# Altium PCB Slave_1 - Copy.PcbDoc
Units mm, origin at the board's own origin, x right, y up, seen from the top; angles counter-clockwise.
Board outline 304.4 x 63 mm, 2 copper layers (Top Layer, Bottom Layer); 90 components, 81 nets, 286 pads, 95 vias.
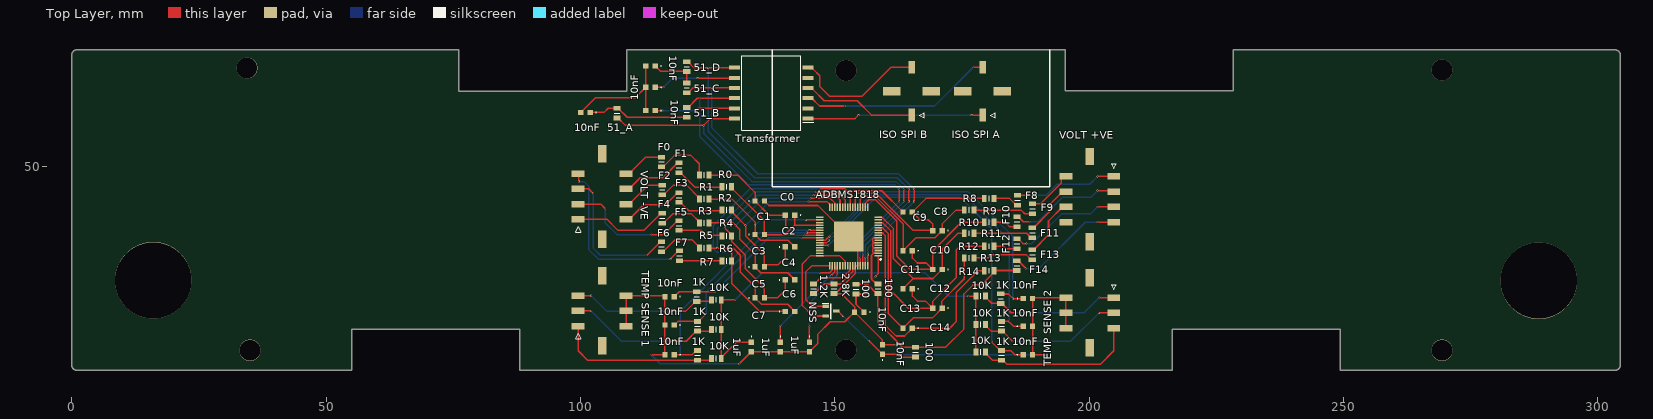
[diagram p0: Top Layer view]
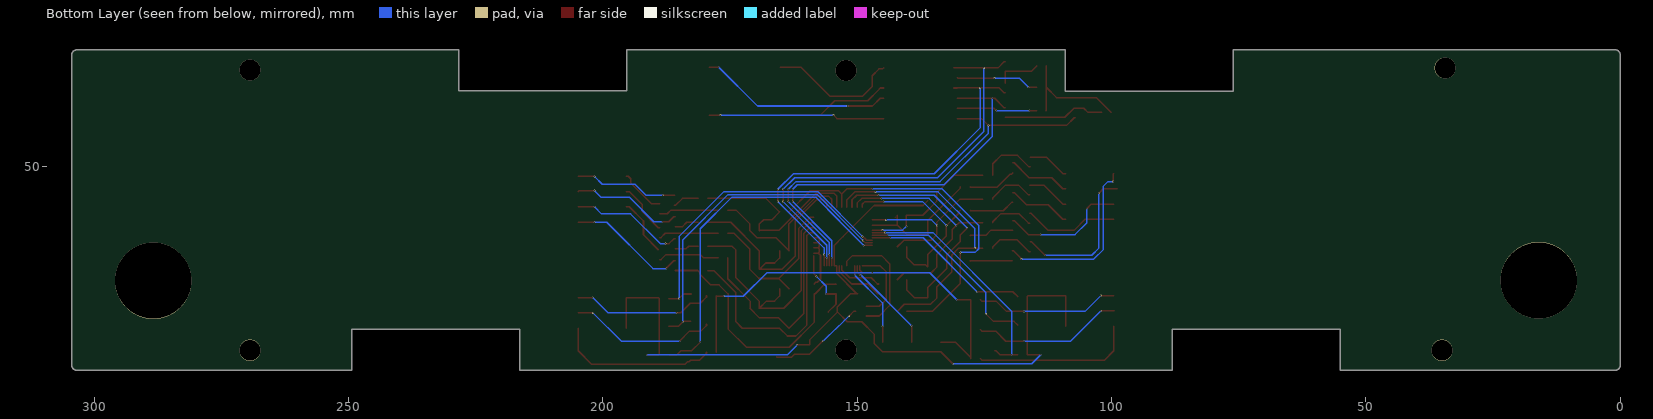
[diagram p1: Bottom Layer view, seen from below]
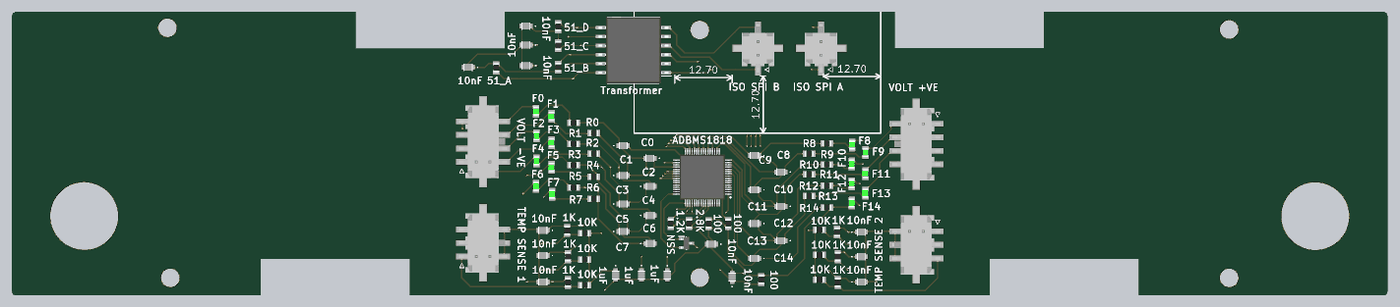
[diagram p2: 3D render of the assembled board from above, using the file's embedded part models]

## Layer stack, top to bottom
Top Solder: solder mask 0.0102, Solder Resist, Dk 3.5
Top Layer: signal copper 0.0356
Dielectric 1: dielectric 0.32, FR-4, Dk 4.8
Bottom Layer: signal copper 0.0356
Bottom Solder: solder mask 0.0102, Solder Resist, Dk 3.5

## Board outline
1.013,9.893 55.083,9.893 55.083,17.993 88.083,17.993 88.083,9.893 216.343,9.893 216.343,17.993 249.343,17.993 249.343,9.893 303.413,9.893 ccw(c303.413,10.893) 304.413,10.893 304.413,71.893 ccw(c303.413,71.893) 303.413,72.893 228.343,72.893 228.343,64.893 195.343,64.893 195.343,72.893 109.083,72.893 109.083,64.793 76.083,64.793 76.083,72.893 1.013,72.893 ccw(c1.013,71.893) 0.013,71.893 0.013,10.893 ccw(c1.013,10.893)

## Design rules (kind name [scope] priority, off if disabled: settings)
Clearance [All] p1: gap=0.17 ignorepadtopadclearanceinfootprint=FALSE
PolygonConnect [All] p1: connectstyle=Relief reliefconductorwidth=0.254 reliefentries=4 polygonreliefangle="90 Angle" airgapwidth=0.254
RoutingVias [All] p1: holewidth=0.3 width=0.35 viastyle="Through Hole" minholewidth=0.3 minwidth=0.35 maxholewidth=0.3 maxwidth=0.35
SolderMaskExpansion [All] p1: expansion=0.102 istentingtop=FALSE
Width [All] p1: maxlimit=0.6 minlimit=0.3 preferedwidth=0.3 minimp=50.000000 maximp=50.000000 favimp=50.000000
30 further rules are at their usual default settings.

## Classes and differential pairs
component class Slave_1: 1.2K 1K 1uF 2.8K 10K 10nF 51_A 51_B 51_C 51_D 100 ADBMS1818 C0 C1 C2 C3 C4 C5 C6 C7 C8 C9 C10 C11 C12 C13 C14 F0 F1 F2 F3 F4 F5 F6 F7 F8 F9 F10 F11 F12 F13 F14 "ISO SPI A" "ISO SPI B" NSS R0 R1 R2 R3 R4 R5 R6 R7 R8 R9 R10 R11 R12 R13 R14 "TEMP SENSE 1" "TEMP SENSE 2" Transformer "VOLT +VE" "VOLT -VE" "VOLTAGE SENSE 1"

## Components (designator, comment, footprint, x,y, rotation, side; value= is the part's Value field where it differs from the comment)
1.2K "RC0805JR-0710KL" RESC2012X60N 145.796,25.908 r90 top
1K "RC0805JR-0710KL" RESC2012X60N 182.626,24.003 r90 top
1K "RC0805JR-0710KL" RESC2012X60N 123.002,12.827 r90 top
1K "RC0805JR-0710KL" RESC2012X60N 122.875,24.384 r90 top
1K "RC0805JR-0710KL" RESC2012X60N 123.002,18.542 r90 top
1K "RC0805JR-0710KL" RESC2012X60N 182.753,18.542 r90 top
1K "RC0805JR-0710KL" RESC2012X60N 182.753,12.827 r90 top
1uF "C2012C0G1E333J125AA" C2012_Commercial 139.319,14.478 r270 top
1uF "C2012C0G1E333J125AA" C2012_Commercial 145.034,14.478 r270 top
1uF "C2012C0G1E333J125AA" C2012_Commercial 133.604,14.478 r270 top
2.8K "RC0805JR-0710KL" RESC2012X60N 149.86,25.908 r90 top
10K "RC0805JR-0710KL" RESC2012X60N 178.689,24.511 r180 top
10K "RC0805JR-0710KL" RESC2012X60N 126.746,12.192 r0 top
10K "RC0805JR-0710KL" RESC2012X60N 178.689,18.923 r180 top
10K "RC0805JR-0710KL" RESC2012X60N 126.746,23.749 r0 top
10K "RC0805JR-0710KL" RESC2012X60N 178.689,13.462 r180 top
10K "RC0805JR-0710KL" RESC2012X60N 126.746,17.907 r0 top
10nF "C2012C0G1E333J125AA" C2012_Commercial 159.385,13.97 r90 top
10nF "C2012C0G1E333J125AA" C2012_Commercial 154.813,21.336 r180 top
10nF "C2012C0G1E333J125AA" C2012_Commercial 187.96,18.542 r0 top
10nF "C2012C0G1E333J125AA" C2012_Commercial 113.792,69.723 r180 top
10nF "C2012C0G1E333J125AA" C2012_Commercial 187.96,12.954 r0 top
10nF "C2012C0G1E333J125AA" C2012_Commercial 117.541,18.796 r180 top
10nF "C2012C0G1E333J125AA" C2012_Commercial 117.541,12.954 r180 top
10nF "C2012C0G1E333J125AA" C2012_Commercial 113.792,60.96 r180 top
10nF "C2012C0G1E333J125AA" C2012_Commercial 117.541,24.384 r180 top
10nF "C2012C0G1E333J125AA" C2012_Commercial 101.001,60.579 r180 top
10nF "C2012C0G1E333J125AA" C2012_Commercial 113.792,65.532 r180 top
10nF "C2012C0G1E333J125AA" C2012_Commercial 187.96,24.003 r0 top
51_A "RC0805JR-0710KL" RESC2012X60N 107.188,60.452 r90 top
51_B "RC0805JR-0710KL" RESC2012X60N 120.904,60.579 r90 top
51_C "RC0805JR-0710KL" RESC2012X60N 120.904,65.405 r90 top
51_D "RC0805JR-0710KL" RESC2012X60N 120.904,69.596 r90 top
100 "RC0805JR-0710KL" RESC2012X60N 165.862,13.462 r270 top
100 "RC0805JR-0710KL" RESC2012X60N 154.178,25.847 r270 top
100 "RC0805JR-0710KL" RESC2012X60N 158.496,25.908 r90 top
ADBMS1818 "ADBMS1818ASWZ" QFP50P1200X1200X160-65N 152.781,36.195 r180 top
C0 "C2012C0G1E333J125AA" C2012_Commercial 135.255,43.18 r0 top
C1 "C2012C0G1E333J125AA" C2012_Commercial 141.224,40.386 r180 top
C2 "C2012C0G1E333J125AA" C2012_Commercial 135.255,36.576 r0 top
C3 "C2012C0G1E333J125AA" C2012_Commercial 141.224,34.163 r0 top
C4 "C2012C0G1E333J125AA" C2012_Commercial 135.255,30.226 r0 top
C5 "C2012C0G1E333J125AA" C2012_Commercial 141.224,27.686 r0 top
C6 "C2012C0G1E333J125AA" C2012_Commercial 135.255,24.13 r0 top
C7 "C2012C0G1E333J125AA" C2012_Commercial 141.224,21.463 r0 top
C8 "C2012C0G1E333J125AA" C2012_Commercial 164.338,41.021 r180 top
C9 "C2012C0G1E333J125AA" C2012_Commercial 170.18,37.338 r180 top
C10 "C2012C0G1E333J125AA" C2012_Commercial 164.338,33.401 r180 top
C11 "C2012C0G1E333J125AA" C2012_Commercial 170.18,29.718 r180 top
C12 "C2012C0G1E333J125AA" C2012_Commercial 164.338,25.908 r180 top
C13 "C2012C0G1E333J125AA" C2012_Commercial 170.18,22.098 r180 top
C14 "C2012C0G1E333J125AA" C2012_Commercial 164.338,18.161 r180 top
F0 "MFU0805FF01000P100" FUSC2012X55N 115.968,50.846 r270 top
F1 "MFU0805FF01000P100" FUSC2012X55N 119.397,49.703 r270 top
F2 "MFU0805FF01000P100" FUSC2012X55N 116.095,45.339 r270 top
F3 "MFU0805FF01000P100" FUSC2012X55N 119.397,43.861 r270 top
F4 "MFU0805FF01000P100" FUSC2012X55N 116.095,39.797 r270 top
F5 "MFU0805FF01000P100" FUSC2012X55N 119.397,38.354 r270 top
F6 "MFU0805FF01000P100" FUSC2012X55N 115.968,34.163 r270 top
F7 "MFU0805FF01000P100" FUSC2012X55N 119.507,32.385 r270 top
F8 "MFU0805FF01000P100" FUSC2012X55N 185.928,43.353 r270 top
F9 "MFU0805FF01000P100" FUSC2012X55N 188.866,41.656 r270 top
F10 "MFU0805FF01000P100" FUSC2012X55N 185.818,39.116 r270 top
F11 "MFU0805FF01000P100" FUSC2012X55N 188.849,36.957 r270 top
F12 "MFU0805FF01000P100" FUSC2012X55N 185.818,34.752 r270 top
F13 "MFU0805FF01000P100" FUSC2012X55N 188.849,32.639 r270 top
F14 "MFU0805FF01000P100" FUSC2012X55N 185.801,30.48 r270 top
"ISO SPI A" "43045-0218" 43045-02YY_181920 179.07,64.77 r0 top
"ISO SPI B" "43045-0218" 43045-02YY_181920 165.1,64.77 r0 top
NSS "NSS1C201LT1G" SOT96P237X111-3N 149.259,21.524 r0 top
R0 "RC0805JR-0710KL" RESC2012X60N 124.333,48.26 r0 top
R1 "RC0805JR-0710KL" RESC2012X60N 128.778,45.974 r0 top
R2 "RC0805JR-0710KL" RESC2012X60N 124.333,43.561 r0 top
R3 "RC0805JR-0710KL" RESC2012X60N 128.778,41.402 r0 top
R4 "RC0805JR-0710KL" RESC2012X60N 124.333,38.862 r0 top
R5 "RC0805JR-0710KL" RESC2012X60N 128.778,36.322 r0 top
R6 "RC0805JR-0710KL" RESC2012X60N 124.333,33.909 r0 top
R7 "RC0805JR-0710KL" RESC2012X60N 128.778,31.369 r0 top
R8 "RC0805JR-0710KL" RESC2012X60N 180.34,43.688 r180 top
R9 "RC0805JR-0710KL" RESC2012X60N 176.403,41.385 r180 top
R10 "RC0805JR-0710KL" RESC2012X60N 180.34,38.989 r180 top
R11 "RC0805JR-0710KL" RESC2012X60N 176.403,36.83 r180 top
R12 "RC0805JR-0710KL" RESC2012X60N 180.34,34.29 r180 top
R13 "RC0805JR-0710KL" RESC2012X60N 176.403,31.987 r180 top
R14 "RC0805JR-0710KL" RESC2012X60N 180.34,29.464 r180 top
"TEMP SENSE 1" "43045-0620" 43045-06YY_181920 104.267,21.59 r270 top
"TEMP SENSE 2" "43045-0620" 43045-06YY_181920 200.152,21.182 r90 top
Transformer "HM2112ZNL" SOP200P1543X320-12N 137.541,64.389 r180 top
"VOLT +VE" "43045-0819" 43045-08YY_181920 200.153,43.537 r90 top
"VOLT -VE" "43045-0819" 43045-08YY_181920 104.267,44.069 r270 top

## Footprints (in the part's own frame and the unit in brackets; to place one, negate y for a bottom-side part, rotate by r counter-clockwise, add the part's x,y. Pads: shape width x height; smd on the part's side, far side on the other; paste and mask are expansions set on the pad)
43045-02YY_181920 [mm]
  rect 1.27x2.54 smd: 1(0,-4.7) 2(0,4.7)
  rect 3.43x1.65 smd: 3(3.885,0) 4(-3.885,0)
  silkscreen extent 1.5,-5.2 2.5,-4.2, body extent -5.33,-5.6 5.33,5.6, height 9.96
43045-06YY_181920 [mm]
  rect 1.27x2.54 smd: 1(3,-4.7) 2(0,-4.7) 3(-3,-4.7) 4(3,4.7) 5(0,4.7) 6(-3,4.7)
  rect 3.43x1.65 smd: 7(6.885,0) 8(-6.885,0)
  silkscreen extent 4.5,-5.2 5.5,-4.2, body extent -8.32,-5.6 8.32,5.6, height 9.96
43045-08YY_181920 [mm]
  rect 1.27x2.54 smd: 1(4.5,-4.7) 2(1.5,-4.7) 3(-1.5,-4.7) 4(-4.5,-4.7) 5(4.5,4.7) 6(1.5,4.7) 7(-1.5,4.7) 8(-4.5,4.7)
  rect 3.43x1.65 smd: 9(8.385,0) 10(-8.385,0)
  silkscreen extent 6,-5.2 7,-4.2, body extent -9.82,-5.6 9.82,5.6, height 9.96
C2012_Commercial [mm]
  rect 1.05x1.05 smd: 1(-0.925,0) 2(0.925,0)
  silkscreen extent -2.12,-0.05 -2.03,0.05, body extent -0.96,-0.8 1.04,0.8, height 1.25
FUSC2012X55N [mm]
  rect 0.89x1.42 smd: 1(-0.97,0) 2(0.97,0)
  silkscreen extent 0,-0.53 0,0.53, body extent -1,-0.63 1,0.63, height 0.55
QFP50P1200X1200X160-65N [mm]
  rect 1.475x0.3 smd: 1(-5.738,3.75) 2(-5.738,3.25) 3(-5.738,2.75) 4(-5.738,2.25) 5(-5.738,1.75) 6(-5.738,1.25) 7(-5.738,0.75) 8(-5.738,0.25) 9(-5.738,-0.25) 10(-5.738,-0.75) 11(-5.738,-1.25) 12(-5.738,-1.75) 13(-5.738,-2.25) 14(-5.738,-2.75) 15(-5.738,-3.25) 16(-5.738,-3.75) 33(5.738,-3.75) 34(5.738,-3.25) 35(5.738,-2.75) 36(5.738,-2.25) 37(5.738,-1.75) 38(5.738,-1.25) 39(5.738,-0.75) 40(5.738,-0.25) 41(5.738,0.25) 42(5.738,0.75) 43(5.738,1.25) 44(5.738,1.75) 45(5.738,2.25) 46(5.738,2.75) 47(5.738,3.25) 48(5.738,3.75)
  rect 0.3x1.475 smd: 17(-3.75,-5.738) 18(-3.25,-5.738) 19(-2.75,-5.738) 20(-2.25,-5.738) 21(-1.75,-5.738) 22(-1.25,-5.738) 23(-0.75,-5.738) 24(-0.25,-5.738) 25(0.25,-5.738) 26(0.75,-5.738) 27(1.25,-5.738) 28(1.75,-5.738) 29(2.25,-5.738) 30(2.75,-5.738) 31(3.25,-5.738) 32(3.75,-5.738) 49(3.75,5.738) 50(3.25,5.738) 51(2.75,5.738) 52(2.25,5.738) 53(1.75,5.738) 54(1.25,5.738) 55(0.75,5.738) 56(0.25,5.738) 57(-0.25,5.738) 58(-0.75,5.738) 59(-1.25,5.738) 60(-1.75,5.738) 61(-2.25,5.738) 62(-2.75,5.738) 63(-3.25,5.738) 64(-3.75,5.738)
  rect 5.84x5.84 smd: 65(0,0)
  silkscreen extent -6.35,4.38 -6.1,4.62, body extent -6,-6 6,6, height 1.6
RESC2012X60N [mm]
  rect 0.95x1.4 smd: 1(-0.95,0) 2(0.95,0)
  silkscreen extent 0,-0.53 0,0.53, body extent -1,-0.63 1,0.63, height 0.6
SOP200P1543X320-12N [mm]
  rect 2.2x0.8 smd: 1(-7.225,5) 2(-7.225,3) 3(-7.225,1) 4(-7.225,-1) 5(-7.225,-3) 6(-7.225,-5) 7(7.225,-5) 8(7.225,-3) 9(7.225,-1) 10(7.225,1) 11(7.225,3) 12(7.225,5)
  silkscreen extent -8.33,-7.35 5.77,7.35, body extent -7.72,-7.35 7.72,7.35, height 3.2
SOT96P237X111-3N [mm]
  rect 1.25x0.6 smd: 1(-1.05,0.955) 2(-1.05,-0.955) 3(1.05,0)
  silkscreen extent -1.67,-1.46 0.07,1.51, body extent -1.18,-1.46 1.18,1.46, height 1.11

## Part data
1.2K 1K 1K 1K 1K 1K 1K 2.8K 10K 10K 10K 10K 10K 10K 51_A 51_B 51_C 51_D 100 100 100 R0 R1 R2 R3 R4 R5 R6 R7 R8 R9 R10 R11 R12 R13 R14: "Resistor", Manufacturer_Name=KEMET, Mouser Part Number=603-RC0805JR-0710KL, Arrow Part Number=RC0805JR-0710KL, Arrow Price/Stock=https://www.arrow.com/en/products/rc0805jr-0710kl/yageo, Datasheet Link=https://datasheet.datasheetarchive.com/originals/distributors/Datasheets_SAMA/902f9e387b938f871d31120f5fc1d65e.pdf, Height=0.6mm, Manufacturer_Part_Number=RC0805JR-0710KL, Mouser Price/Stock=https://www.mouser.co.uk/ProductDetail/YAGEO/RC0805JR-0710KL?qs=ZFGQJeMQzF5q%2Fp77vM%2FrVQ%3D%3D
1uF 1uF 1uF 10nF 10nF 10nF 10nF 10nF 10nF 10nF 10nF 10nF 10nF 10nF 10nF C0 C1 C2 C3 C4 C5 C6 C7 C8 C9 C10 C11 C12 C13 C14: "Capacitor", Manufacturer_Name=TDK, Mouser Part Number=810-C2012C0G1E333J, Arrow Part Number=C2012C0G1E333J125AA, Arrow Price/Stock=https://www.arrow.com/en/products/c2012c0g1e333j125aa/tdk, Datasheet Link=https://product.tdk.com/system/files/dam/doc/product/capacitor/ceramic/mlcc/catalog/mlcc_commercial_general_en.pdf, Height=0.75mm, Manufacturer_Part_Number=C2012C0G1E333J125AA, Mouser Price/Stock=https://www.mouser.co.uk/ProductDetail/TDK/C2012C0G1E333J125AA?qs=NRhsANhppD9YN6415mAquQ%3D%3D
ADBMS1818: "Integrated Circuit", Manufacturer_Name="Analog Devices", Mouser Part Number=584-ADBMS1818ASWZ, Arrow Part Number=ADBMS1818ASWZ, Arrow Price/Stock=https://www.arrow.com/en/products/adbms1818aswz/analog-devices, Datasheet Link=https://www.analog.com/media/en/technical-documentation/data-sheets/adbms1818.pdf, Height=1.6mm, Manufacturer_Part_Number=ADBMS1818ASWZ, Mouser Price/Stock=https://www.mouser.co.uk/ProductDetail/Analog-Devices/ADBMS1818ASWZ?qs=pUKx8fyJudB64VZO6QRyWQ%3D%3D
F0 F1 F2 F3 F4 F5 F6 F7 F8 F9 F10 F11 F12 F13 F14: "Fuse", Manufacturer_Name=Vishay, Mouser Part Number=594-MFU0805FF01000P1, Arrow Part Number=MFU0805FF01000P100, Arrow Price/Stock=https://www.arrow.com/en/products/mfu0805ff01000p100/vishay?region=nac, Datasheet Link=https://mouser.componentsearchengine.com/Datasheets/1/MFU0805FF01000P100.pdf, Height=0.55mm, Manufacturer_Part_Number=MFU0805FF01000P100, Mouser Price/Stock=https://www.mouser.co.uk/ProductDetail/Vishay-Beyschlag/MFU0805FF01000P100?qs=LqRyH8pEnDjDHmrJUWI99w%3D%3D
"ISO SPI A" "ISO SPI B": "Connector", Manufacturer_Name=Molex, Mouser Part Number=538-43045-0218, Arrow Part Number=43045-0218, Arrow Price/Stock=https://www.arrow.com/en/products/43045-0218/molex, Datasheet Link=https://www.molex.com/pdm_docs/sd/430450218_sd.pdf, Height=9.91mm, Manufacturer_Part_Number=43045-0218, Mouser Price/Stock=https://www.mouser.co.uk/ProductDetail/Molex/43045-0218?qs=4XSMV6Twtb2qUKINalLbdA%3D%3D
NSS: "Integrated Circuit", Manufacturer_Name=onsemi, Mouser Part Number=863-NSS1C201LT1G, Arrow Part Number=NSS1C201LT1G, Arrow Price/Stock=https://www.arrow.com/en/products/nss1c201lt1g/on-semiconductor?region=nac, Datasheet Link=https://www.arrow.com/en/products/nss1c201lt1g/on-semiconductor?region=nac, Height=1.11mm, Manufacturer_Part_Number=NSS1C201LT1G, Mouser Price/Stock=https://www.mouser.co.uk/ProductDetail/onsemi/NSS1C201LT1G?qs=N5dOQkml4H%252BCR%252BG2EuQ5hA%3D%3D
"TEMP SENSE 1" "TEMP SENSE 2": "Connector", Manufacturer_Name=Molex, Mouser Part Number=538-43045-0620, Arrow Part Number=43045-0620, Arrow Price/Stock=https://www.arrow.com/en/products/43045-0620/molex, Datasheet Link=https://www.molex.com/pdm_docs/sd/430450218_sd.pdf, Height=9.91mm, Manufacturer_Part_Number=43045-0620, Mouser Price/Stock=https://www.mouser.co.uk/ProductDetail/Molex/43045-0620?qs=mrPiglD9aYJhVB0xc7lbqQ%3D%3D
Transformer: "Transformer", Manufacturer_Name=Pulse, Mouser Part Number=673-HM2112ZNL, Arrow Part Number=HM2112ZNL, Arrow Price/Stock=https://www.arrow.com/en/products/hm2112znl/pulse-electronics-corporation, Datasheet Link=https://productfinder.pulseeng.com/doc_type/WEB301/doc_num/HM2112ZNL/doc_part/HM2112ZNL.pdf, Height=3.2mm, Manufacturer_Part_Number=HM2112ZNL, Mouser Price/Stock=https://www.mouser.co.uk/ProductDetail/Pulse-Electronics/HM2112ZNL/?qs=chTDxNqvsylLr1OAY8rM9g%3D%3D
"VOLT +VE" "VOLT -VE": "Connector", Manufacturer_Name=Molex, Mouser Part Number=538-43045-0819, Arrow Part Number=43045-0819, Arrow Price/Stock=https://www.arrow.com/en/products/43045-0819/molex?region=nac, Datasheet Link=https://www.molex.com/pdm_docs/sd/430450218_sd.pdf, Height=9.91mm, Manufacturer_Part_Number=43045-0819, Mouser Price/Stock=https://www.mouser.co.uk/ProductDetail/Molex/43045-0819?qs=6RXNyJqNVR7Wg0o6pQawlw%3D%3D

## Via types
v1: diameter 0.35, hole 0.3, Top Layer to Bottom Layer, 87 vias
v2: diameter 4.15, hole 4.1, Top Layer to Bottom Layer, 6 vias
v3: diameter 15.05, hole 15, Top Layer to Bottom Layer, 2 vias

## Nets (pads, with @x,y where several pads share a name; then routed paths per layer and width w, separated by ;. In a path a pad name is that pad's centre, name@x,y a point inside that pad or via, vN(x,y) a via of type N, cw(c..) or ccw(c..) an arc to the next point about the centre after c; other vN are vias at no path point)
C0: ADBMS1818.38 C0.1 C1.2 R0.2 | length 28.5
  Top Layer w0.3: R0.2 130.937,48.26 134.33,44.867 C0.1 137.124,40.386 C1.2 140.335,40.35 v1(140.335,38.227) ; v1(145.034,37.465) 145.048,37.465 145.067,37.445 ADBMS1818.38
  Bottom Layer w0.3: v1(140.335,38.227) 141.097,37.465 v1(145.034,37.465)
C1: ADBMS1818.36 C1.1 C2.2 R1.2 | length 25.6
  Top Layer w0.3: R1.2 129.728,45.749 136.18,39.297 C2.2 140.28,36.576 142.149,38.445 ADBMS1818.36 ; 142.149,38.572 C1.1 ; C1.1@142.524,39.978 C1.1@142.524,40.011
C2: ADBMS1818.34 C2.1 C3.2 R2.2 | length 35.4
  Top Layer w0.3: R2.2 129.794,43.561 134.33,39.025 C2.1 135.473,35.433 140.879,35.433 C3.2 ; v1(144.337,39.445) ADBMS1818.34
  Bottom Layer w0.3: v1(134.314,38.355) 135.404,39.445 v1(144.337,39.445)
C3: ADBMS1818.32 C3.1 C4.2 R3.2 | length 40.1
  Top Layer w0.3: R3.2 130.053,41.077 130.053,40.762 v1(132.461,38.354) 132.461,36.322 136.18,32.603 C4.2 136.555,30.601 138.805,30.601 140.299,32.095 C3.1 ; v1(144.78,43.053) 148.499,43.053 149.031,42.521 ADBMS1818.32
  Bottom Layer w0.3: v1(132.461,38.354) 137.16,43.053 v1(144.78,43.053)
C4: ADBMS1818.30 C4.1 C5.2 R4.2 | length 46.9
  Top Layer w0.3: R4.2 130.048,38.862 v1(130.556,38.354) 131.318,37.592 131.318,35.687 134.33,32.675 C4.1 135.473,29.083 140.752,29.083 C5.2 ; v1(145.288,43.688) 149.116,43.688 150.031,42.773 ADBMS1818.30
  Bottom Layer w0.3: v1(130.556,38.354) 135.89,43.688 v1(145.288,43.688)
C5: ADBMS1818.28 C5.1 C6.2 R5.2 | length 50.9
  Top Layer w0.3: v1(128.397,37.846) 128.407,37.836 128.439,37.836 129.728,36.547 R5.2 129.728,35.245 132.398,32.575 132.398,29.909 136.18,26.126 C6.2 138.684,24.13 140.299,25.745 C5.1 ; v1(145.796,44.323) 150.114,44.323 151.031,43.406 ADBMS1818.28
  Bottom Layer w0.3: v1(128.397,37.846) 134.874,44.323 v1(145.796,44.323)
C6: ADBMS1818.26 C6.1 C7.2 R6.2 | length 59.3
  Top Layer w0.3: R6.2 v1(126.873,33.909) 130.048,33.909 131.445,32.512 131.445,29.21 134.33,26.325 C6.1 135.6,22.86 140.752,22.86 C7.2 ; v1(146.431,44.958) 150.495,44.958 152.031,43.422 ADBMS1818.26
  Bottom Layer w0.3: v1(126.873,33.909) 126.873,37.719 134.112,44.958 v1(146.431,44.958)
C7: ADBMS1818.24 C7.1 C8.2 R7.2 | length 72.8
  Top Layer w0.3: v1(129.728,33.067) R7.2 129.728,26.99 135.255,21.463 C7.1 ; v1(147.066,45.593) 152.011,45.593 153.031,44.573 ; ADBMS1818.24 153.031,44.573 ; C8.2 159.222,45.212 153.67,45.212 153.031,44.573
  Bottom Layer w0.3: v1(129.728,33.067) 126.826,33.067 126.111,33.782 126.111,38.354 133.35,45.593 v1(147.066,45.593)
C8: ADBMS1818.22 C8.1 C9.2 R8.2 | length 42.3
  Top Layer w0.3: ADBMS1818.22 154.031,44.176 154.559,44.704 158.115,44.704 165.39,37.429 169.164,37.429 C9.2 169.255,38.644 168.402,39.497 166.787,39.497 C8.1 167.93,43.688 R8.2
C9: ADBMS1818.20 C9.1 C10.2 R9.2 | length 33.8
  Top Layer w0.3: ADBMS1818.20 155.031,43.525 155.575,44.069 158.018,44.069 163.449,38.638 C10.2@163.449,33.437 ; C10.2 C10.2@163.449,33.437 ; R9.2 173.846,41.385 171.105,38.644 C9.1 169.708,35.941 165.953,35.941 C10.2@163.449,33.437
C10: ADBMS1818.18 C10.1 C11.2 R10.2 | length 46.8
  Top Layer w0.3: ADBMS1818.18 156.031,42.773 156.692,43.434 157.988,43.434 162.179,39.243 162.179,32.385 164.81,29.754 C11.2@168.91,29.754 ; C10.1 165.263,31.968 166.243,30.988 167.985,30.988 C11.2@168.91,30.063 ; C11.2 C11.2@168.91,30.063 ; R10.2 174.879,38.989 169.291,33.401 169.291,29.754 C11.2@168.91,29.754 ; C11.2@168.91,29.754 C11.2@168.91,30.063
C11: ADBMS1818.16 C11.1 C12.2 R11.2 | length 34.2
  Top Layer w0.3: ADBMS1818.16 159.359,39.945 161.544,37.76 161.544,31.841 165.445,27.94 ; C12.2 164.447,26.942 ; 164.507,27.003 165.445,27.94 ; R11.2 174.244,36.83 171.105,33.691 C11.1 169.327,27.94 165.445,27.94
C12: ADBMS1818.14 C12.1 C13.2 R12.2 | length 50.2
  Top Layer w0.3: ADBMS1818.14 159.359,38.945 161.036,37.268 161.036,25.527 164.465,22.098 C13.2 ; C12.1 165.263,24.475 166.243,23.495 167.858,23.495 C13.2 ; R12.2 174.625,34.29 173.863,33.528 173.863,28.067 169.291,23.495 169.291,22.134 C13.2
C13: ADBMS1818.12 C13.1 C14.2 R13.2 | length 43.3
  Top Layer w0.3: ADBMS1818.12 159.359,37.945 160.528,36.776 160.528,21.046 C14.2 165.445,20.193 169.2,20.193 C13.1 171.069,22.134 171.069,23.495 175.453,27.879 R13.2
C14: ADBMS1818.10 C14.1 R14.2 | length 48.3
  Top Layer w0.3: ADBMS1818.10 159.359,36.945 159.893,36.411 159.893,18.796 162.052,16.637 163.739,16.637 C14.1 172.593,18.161 173.863,19.431 173.863,25.146 178.181,29.464 R14.2
C15: 100.2@158.496,26.858 ADBMS1818.2 ADBMS1818.4 ADBMS1818.6 ADBMS1818.8 | length 13.8
  Top Layer w0.3: 157.649,34.915 157.462,34.728 157.462,34.162 157.679,33.945 ; 157.679,32.945 157.462,33.162 157.462,33.728 157.679,33.945 ; 100.2@158.496,26.858 158.171,27.183 157.856,27.183 157.226,27.813 157.226,32.492 157.649,32.915 157.814,32.915 157.844,32.945 ADBMS1818.2 ; ADBMS1818.4 157.679,33.945 ; ADBMS1818.6 157.679,34.945 157.462,35.162 157.462,35.728 157.679,35.945 ADBMS1818.8
Cell1+: "VOLT -VE.7" F1.1 | length 12.5
  Top Layer w0.3: 108.967,45.569 109.602,45.569 111.785,47.752 116.211,47.752 119.132,50.673 F1.1
Cell1-: "VOLT -VE.8" F0.1 | length 8.3
  Top Layer w0.3: 108.967,48.569 109.602,48.569 112.849,51.816 F0.1
Cell2: "VOLT -VE.6" F2.1 | length 8.7
  Top Layer w0.3: 108.967,42.569 109.602,42.569 113.342,46.309 F2.1
Cell3: "VOLT -VE.5" F3.1 | length 12.6
  Top Layer w0.3: 108.967,39.569 109.602,39.569 112.451,42.418 116.719,42.418 119.132,44.831 F3.1
Cell4: "VOLT -VE.1" F4.1 | length 18.8
  Top Layer w0.3: 99.567,39.569 105.211,39.569 107.315,37.465 112.528,37.465 115.83,40.767 F4.1
Cell5: "VOLT -VE.2" F5.1 | length 25.1
  Top Layer w0.3: 99.567,42.569 103.989,42.569 v1(104.902,41.656) ; v1(113.919,36.576) 116.384,36.576 119.132,39.324 F5.1
  Bottom Layer w0.3: v1(104.902,41.656) 104.902,38.862 107.188,36.576 v1(113.919,36.576)
Cell6: "VOLT -VE.3" F6.1 | length 29.9
  Top Layer w0.3: 98.932,45.569 101.624,45.569 v1(102.489,44.704) ; v1(113.03,32.512) 113.04,32.522 113.092,32.522 115.703,35.133 F6.1
  Bottom Layer w0.3: v1(102.489,44.704) 102.489,33.909 103.886,32.512 v1(113.03,32.512)
Cell7: "VOLT -VE.4" F7.1 | length 35.8
  Top Layer w0.3: 99.567,48.569 99.695,48.441 v1(99.695,46.99) ; v1(117.729,31.75) 117.739,31.76 117.739,31.852 119.242,33.355 F7.1
  Bottom Layer w0.3: v1(99.695,46.99) 100.711,46.99 101.6,46.101 101.6,33.655 103.505,31.75 v1(117.729,31.75)
Cell8: "VOLT +VE.1" F8.1 | length 20.5
  Top Layer w0.3: F8.1 v1(188.214,44.323) ; v1@201.676,48.037 204.853,48.037
  Bottom Layer w0.3: v1(188.214,44.323) 191.516,44.323 193.675,46.482 200.152,46.482 v1(201.676,48.006)
Cell9: "VOLT +VE.5" F9.1 | length 9.3
  Top Layer w0.3: F9.1 190.454,42.626 194.544,46.716 194.544,47.552 195.029,48.037 195.453,48.037
Cell10: "VOLT +VE.2" F10.1 | length 22
  Top Layer w0.3: F10.1 186.083,40.086 187.053,39.116 v1(188.341,39.116) ; v1(201.676,45.212) 204.678,45.212 204.853,45.037
  Bottom Layer w0.3: v1(188.341,39.116) 189.992,39.116 194.818,43.942 200.406,43.942 v1(201.676,45.212)
Cell11: "VOLT +VE.6" F11.1 | length 10.4
  Top Layer w0.3: F11.1 189.114,37.927 192.278,41.091 192.278,42.497 194.818,45.037 195.453,45.037
Cell12: "VOLT +VE.3" F12.1 | length 22.4
  Top Layer w0.3: F12.1 186.083,35.722 187.007,34.798 v1(187.706,34.798) ; v1(201.676,42.037) 204.853,42.037
  Bottom Layer w0.3: v1(187.706,34.798) 188.722,34.798 194.564,40.64 200.279,40.64 v1(201.676,42.037)
Cell13: "VOLT +VE.7" F13.1 | length 11.4
  Top Layer w0.3: F13.1@189.114,33.609 192.024,36.519 192.024,39.243 194.818,42.037 195.453,42.037
Cell14: "VOLT +VE.4" F14.1 | length 23.5
  Top Layer w0.3: F14.1 186.066,31.45 187.552,29.964 187.552,29.901 v1(187.562,29.891) ; v1(201.676,38.989) 204.805,38.989 204.853,39.037
  Bottom Layer w0.3: v1@187.585,29.901 190.175,29.901 199.263,38.989 v1(201.676,38.989)
CF1+: F1.2 R1.1 | length 9.7
  Top Layer w0.3: F1.2 119.692,48.438 119.964,48.438 122.555,45.847 127.701,45.847 R1.1
CF1-: F0.2 R0.1 | length 11.3
  Top Layer w0.3: F0.2 116.233,49.876 118.491,52.134 121.729,52.134 123.383,50.48 R0.1
CF2: F2.2 R2.1 | length 9.3
  Top Layer w0.3: F2.2 116.36,44.369 118.219,46.228 120.941,46.228 123.383,43.786 R2.1
CF3: F3.2 R3.1 | length 9.2
  Top Layer w0.3: F3.2 119.662,42.891 121.278,41.275 127.701,41.275 R3.1
CF4: F4.2 R4.1 | length 8.9
  Top Layer w0.3: F4.2 116.36,38.827 118.173,40.64 121.83,40.64 123.383,39.087 R4.1
CF5: F5.2 R5.1 | length 8.9
  Top Layer w0.3: F5.2 123.779,37.384 124.714,36.449 127.701,36.449 R5.1
CF6: F6.2 R6.1 | length 9.2
  Top Layer w0.3: F6.2 116.233,33.193 118.6,35.56 121.957,35.56 123.383,34.134 R6.1
CF7: F7.2 R7.1 | length 8.3
  Top Layer w0.3: F7.2 127.782,31.415 R7.1
CF8: F8.2 R8.1 | length 5.2
  Top Layer w0.3: R8.1 184.358,43.688 185.663,42.383 F8.2
CF9: F9.2 R9.1 | length 11.8
  Top Layer w0.3: R9.1 177.37,41.402 186.632,41.402 187.348,40.686 F9.2
CF10: F10.2 R10.1 | length 4.9
  Top Layer w0.3: R10.1 183.515,38.989 184.358,38.146 F10.2
CF11: F11.2 R11.1 | length 11.8
  Top Layer w0.3: R11.1 187.741,36.83 188.584,35.987 F11.2
CF12: F12.2 R12.1 | length 4.7
  Top Layer w0.3: R12.1 183.134,34.29 183.642,33.782 F12.2
CF13: F13.2 R13.1 | length 12.2
  Top Layer w0.3: R13.1 180.196,31.987 180.848,32.639 187.614,32.639 188.584,31.669 F13.2
CF14: 100.1 F14.2 R14.1 | length 50.6
  Top Layer w0.3: 100.1@154.239,26.858 154.178,26.797 156.432,26.797 158.271,24.958 158.496,24.958 158.496,19.304 163.388,14.412 165.862,14.412 171.765,14.412 175.387,18.034 175.387,24.892 177.165,26.67 178.816,26.67 180.965,28.819 180.965,29.139 181.336,29.51 F14.2
CT_SEC_A: 10nF.1@114.717,60.96 Transformer.11 | length 15.8
  Top Layer w0.3: 10nF.1@114.717,60.96 v1(116.205,60.96) ; v1(122.682,60.96) 123.151,61.429 130.277,61.429 Transformer.11
  Bottom Layer w0.3: v1(116.205,60.96) v1(122.682,60.96)
CT_SEC_B: 10nF.1@114.717,65.532 Transformer.8 | length 16.4
  Top Layer w0.3: 10nF.1@114.717,65.532 v1(116.332,65.532) ; v1(123.037,67.349) 130.277,67.349 Transformer.8
  Bottom Layer w0.3: v1(116.332,65.532) 118.149,67.349 v1(123.037,67.349)
GND: 1uF.2 2.8K.1 10nF.2@116.616,12.954 10nF.2@116.616,18.796 10nF.2@116.616,24.384 10nF.2@153.888,21.336 10nF.2@159.385,14.895 10nF.2@188.885,12.954 10nF.2@188.885,18.542 10nF.2@188.885,24.003 "TEMP SENSE 1.4" "TEMP SENSE 1.5" "TEMP SENSE 1.6" "TEMP SENSE 2.4" "TEMP SENSE 2.5" "TEMP SENSE 2.6" ADBMS1818.59 ADBMS1818.60 ADBMS1818.65 C0.2 | length 181.3
  Top Layer w0.3: 108.967,18.59 108.967,21.59 108.967,24.59 116.41,24.59 116.616,24.384 116.616,18.796 116.616,12.954 v1(113.919,12.954) ; v1(131.191,11.176) 131.201,11.186 131.237,11.186 133.604,13.553 139.319,13.553 145.034,13.553 146.685,15.204 146.685,17.018 149.098,19.431 151.983,19.431 10nF.2@153.888,21.336 ; C0.2 137.069,42.291 146.685,42.291 ; 146.695,42.281 ADBMS1818.65 154.531,34.445 ADBMS1818.60 ADBMS1818.59 154.031,28.904 2.8K.1@150.085,24.958 ; 2.8K.1 2.8K.1@150.085,24.958 ; v1(161.798,14.859) 161.784,14.859 161.748,14.895 159.385,14.895 159.385,15.839 10nF.2@153.888,21.336 ; v1(191.389,12.954) 188.885,12.954 188.885,18.542 188.885,24.003 189.064,24.182 195.452,24.182 195.452,21.182 195.452,18.182 ; 2.8K.1@150.085,24.958 151.318,24.958 153.888,22.388 10nF.2@153.888,21.336
  Bottom Layer w0.3: v1(113.919,12.954) 115.697,11.176 v1(131.191,11.176) ; v1(161.798,14.859) 163.703,12.954 v1(191.389,12.954)
GPIO1: 1K.2@123.002,13.777 10nF.1@118.466,12.954 ADBMS1818.39 | length 47.2
  Top Layer w0.3: 10nF.1@118.466,12.954 v1(119.634,12.954) 121.954,12.954 122.777,13.777 1K.2@123.002,13.777 ; v1(144.526,36.957) 144.54,36.957 144.552,36.945 ADBMS1818.39
  Bottom Layer w0.3: v1(119.634,12.954) 119.634,21.463 135.128,36.957 v1(144.526,36.957)
GPIO2: 1K.2@123.002,19.492 10nF.1@118.466,18.796 ADBMS1818.40 | length 38.3
  Top Layer w0.3: 10nF.1@118.466,18.796 119.162,19.492 123.227,19.492 124.68,20.945 124.704,20.945 v1(124.714,20.955) ; v1(144.018,36.449) 145.246,36.449 145.25,36.445 ADBMS1818.40
  Bottom Layer w0.3: v1(124.714,20.955) 124.714,25.146 136.017,36.449 v1(144.018,36.449)
GPIO3: 1K.2@122.875,25.334 10nF.1@118.466,24.384 ADBMS1818.41 | length 33.4
  Top Layer w0.3: 10nF.1@118.466,24.384 119.416,25.334 122.875,25.334 v1@126.443,25.334 ; v1(143.51,35.954) 143.519,35.945 ADBMS1818.41
  Bottom Layer w0.3: v1(126.443,25.35) 137.047,35.954 v1(143.51,35.954)
GPIO4: 1K.2@182.626,24.953 10nF.1@187.035,24.003 ADBMS1818.42 | length 62.6
  Top Layer w0.3: ADBMS1818.42 148.173,35.445 148.349,35.621 148.349,35.638 148.932,36.221 v1(148.945,36.221) ; 1K.2@182.626,24.953 182.687,24.892 184.15,24.892 v1(185.039,24.003) 10nF.1@187.035,24.003
  Bottom Layer w0.3: v1(148.945,36.221) 157.682,44.958 176.276,44.958 185.039,36.195 v1(185.039,24.003)
GPIO5: 1K.2@182.753,19.492 10nF.1@187.035,18.542 ADBMS1818.43 | length 65.7
  Top Layer w0.3: ADBMS1818.43 148.356,34.945 v1(148.844,35.433) ; 1K.2@182.753,19.492 184.202,19.492 184.263,19.431 v1(184.277,19.431) 185.166,18.542 10nF.1@187.035,18.542
  Bottom Layer w0.3: v1(148.844,35.433) 148.858,35.433 157.875,44.45 175.387,44.45 184.277,35.56 v1(184.277,19.431)
GPIO6: 1K.2@182.753,13.777 10nF.1@187.035,12.954 ADBMS1818.44 | length 69.9
  Top Layer w0.3: ADBMS1818.44 148.675,34.445 148.703,34.417 v1(148.717,34.417) ; v1@180.83,15.476 182.528,13.777 182.753,13.777 182.814,13.716 184.658,13.716 185.42,12.954 10nF.1@187.035,12.954
  Bottom Layer w0.3: v1(148.717,34.417) 153.453,39.153 153.453,39.215 158.18,43.942 174.625,43.942 180.848,37.719 v1(180.848,15.494)
ICMP: 1.2K.1 2.8K.2 ADBMS1818.58 | length 10.7
  Top Layer w0.3: 1.2K.1 146.021,24.958 147.921,26.858 2.8K.2 151.064,26.858 153.531,29.325 ADBMS1818.58
IMA: 51_B.2 ADBMS1818.61 Transformer.10 | length 79.4
  Top Layer w0.3: 51_B.2 121.129,61.529 122.963,63.363 123.434,63.363 123.452,63.381 130.308,63.381 Transformer.10 ; v1(155.026,32.004) 155.031,31.999 ADBMS1818.61 ; v1(162.687,43.053) v1(162.687,45.466)
  Bottom Layer w0.3: v1(123.444,63.373) 123.444,55.88 132.969,46.355 161.798,46.355 v1(162.687,45.466) ; v1@155.026,32.018 155.016,32.027 155.016,35.382 v1(162.687,43.053)
IMA_CON: "ISO SPI A.2" Transformer.3 | length 38.1
  Top Layer w0.3: Transformer.3 145.466,63.389 147.006,61.849 v1(151.892,61.849) ; v1(177.228,69.47) 179.07,69.47
  Bottom Layer w0.3: v1(151.892,61.849) 169.607,61.849 v1(177.228,69.47)
IMB: 51_D.2 ADBMS1818.63 Transformer.7 | length 85.9
  Top Layer w0.3: 51_D.2 121.129,70.546 122.333,69.342 127.395,69.342 127.442,69.389 Transformer.7 Transformer.7@131.016,69.389 ; v1(156.026,32.004) 156.031,31.999 ADBMS1818.63 ; v1(164.592,43.053) v1(164.592,45.466)
  Bottom Layer w0.3: v1(125.095,69.342) 125.095,56.896 134.239,47.752 162.306,47.752 v1(164.592,45.466) ; v1(156.026,32.004) 156.016,32.014 156.016,34.477 v1(164.592,43.053)
IMB_CON: "ISO SPI B.2" Transformer.6 | length 26.3
  Top Layer w0.3: Transformer.6 145.016,69.139 145.745,69.139 147.066,67.818 147.066,65.659 148.971,63.754 155.354,63.754 161.07,69.47 165.1,69.47
IPA: 51_A.1 ADBMS1818.62 Transformer.12 | length 88.2
  Top Layer w0.3: 51_A.1 107.188,59.563 107.352,59.563 108.876,58.039 v1(124.206,58.039) 125.556,59.389 Transformer.12 ; v1(155.521,32.639) 155.531,32.629 ADBMS1818.62 ; v1(163.576,43.053) v1(163.576,45.466)
  Bottom Layer w0.3: v1(124.206,58.039) 124.206,56.515 133.731,46.99 162.052,46.99 v1(163.576,45.466) ; v1(155.521,32.639) 155.521,34.998 v1(163.576,43.053)
IPA_CON: "ISO SPI A.1" Transformer.1 | length 34.6
  Top Layer w0.3: Transformer.1 154.004,59.389 v1(154.686,60.071) ; v1(176.912,60.07) 176.913,60.07 179.07,60.07
  Bottom Layer w0.3: v1(154.686,60.071) v1(176.912,60.07)
IPB: 51_C.1 ADBMS1818.64 Transformer.9 | length 81.9
  Top Layer w0.3: 51_C.1 121.129,64.455 122.079,65.405 v1(125.857,65.405) 125.865,65.397 130.308,65.397 Transformer.9 Transformer.9@131.016,65.389 ; v1(156.511,32.639) 156.521,32.629 156.521,31.874 156.531,31.864 ADBMS1818.64 ; v1(165.608,43.053) v1(165.608,45.466)
  Bottom Layer w0.3: v1(125.857,65.405) 125.857,57.531 134.874,48.514 162.56,48.514 v1(165.608,45.466) ; v1(156.511,32.639) 156.511,33.956 v1(165.608,43.053)
IPB_CON: "ISO SPI B.1" Transformer.4 | length 22.6
  Top Layer w0.3: Transformer.4 145.466,65.389 145.716,65.139 145.716,65.104 147.955,62.865 154.431,62.865 157.226,60.07 165.1,60.07
Net1.2K_2: 1.2K.2 ADBMS1818.57 | length 9.2
  Top Layer w0.3: 1.2K.2 146.021,26.858 147.23,28.067 151.481,28.067 153.031,29.617 ADBMS1818.57
Net10nF_1: 10nF.1@114.717,69.723 51_C.2 51_D.1 | length 8.9
  Top Layer w0.3: 10nF.1@114.717,69.723 115.794,68.646 51_D.1 51_C.2
NetADBMS1818_48: ADBMS1818.48 ADBMS1818.55 NSS.2 | length 24.1
  Top Layer w0.3: NSS.2 145.674,20.569 143.637,22.606 143.637,30.861 145.221,32.445 ADBMS1818.48 150.943,32.445 152.031,31.357 ADBMS1818.55
NetADBMS1818_49: ADBMS1818.49 NSS.1 | length 15.1
  Top Layer w0.3: NSS.1 145.669,22.479 144.272,23.876 144.272,29.21 145.519,30.457 ADBMS1818.49
NSS_V+: 10nF.1@159.385,13.045 100.2@165.862,12.512 NSS.3 | length 19.3
  Top Layer w0.3: NSS.3 150.634,21.524 151.574,20.584 151.628,20.584 v1(151.638,20.574) ; v1(156.718,15.621) 156.728,15.611 156.819,15.611 159.385,13.045 162.342,13.045 162.941,12.446 165.796,12.446 100.2@165.862,12.512
  Bottom Layer w0.3: v1(151.638,20.574) 152.525,19.687 152.527,19.685 156.348,15.991 v1(156.718,15.621)
TEMP1: 1K.1@123.002,11.877 10K.1@125.796,12.192 "TEMP SENSE 1.1" | length 32
  Top Layer w0.3: 99.567,18.59 99.567,13.717 101.407,11.877 125.481,11.877 10K.1@125.796,12.192
TEMP2: 1K.1@123.002,17.592 10K.1@125.796,17.907 "TEMP SENSE 1.2" | length 29.8
  Top Layer w0.3: 99.441,21.59 99.567,21.59 v1(102.108,21.59) ; v1(117.221,15.621) 120.806,15.621 122.777,17.592 125.481,17.592 10K.1@125.796,17.907
  Bottom Layer w0.3: v1(102.108,21.59) 108.077,15.621 v1(117.221,15.621)
TEMP3: 1K.1@122.875,23.434 10K.1@125.796,23.749 "TEMP SENSE 1.3" | length 28.5
  Top Layer w0.3: 99.567,24.59 v1(102.095,24.59) ; v1(117.221,21.463) 120.679,21.463 122.65,23.434 125.481,23.434 10K.1@125.796,23.749
  Bottom Layer w0.3: v1(102.095,24.59) 105.222,21.463 v1(117.221,21.463)
TEMP4: 1K.1@182.626,23.053 10K.1@179.639,24.511 "TEMP SENSE 2.1" | length 27.9
  Top Layer w0.3: 10K.1@179.639,24.511 179.639,24.286 180.872,23.053 182.626,23.053 182.851,23.053 184.685,21.219 185.537,21.219 v1(185.547,21.209) ; v1(201.994,24.182) 204.852,24.182
  Bottom Layer w0.3: v1(185.547,21.209) 199.021,21.209 v1(201.994,24.182)
TEMP5: 1K.1@182.753,17.592 10K.1@179.639,18.923 "TEMP SENSE 2.2" | length 29
  Top Layer w0.3: 10K.1@179.639,18.923 179.639,18.698 180.745,17.592 182.753,17.592 182.978,17.592 184.902,15.668 184.902,15.631 v1(184.912,15.621) ; v1(201.931,21.182) 204.852,21.182
  Bottom Layer w0.3: v1(184.912,15.621) 196.369,15.621 v1(201.931,21.182)
TEMP6: 1K.1@182.753,11.877 10K.1@179.639,13.462 "TEMP SENSE 2.3" | length 31.9
  Top Layer w0.3: 10K.1@179.639,13.462 179.639,13.237 180.999,11.877 182.753,11.877 183.078,11.552 183.393,11.552 183.896,11.049 202.184,11.049 204.852,13.717 204.852,18.182
V+: 10nF.1@155.738,21.336 100.2@154.178,24.897 ADBMS1818.1 | length 14.7
  Top Layer w0.3: 10nF.1@155.738,21.336 154.178,22.896 154.178,24.897 154.183,24.892 v1(156.083,24.892) ; v1(157.988,28.321) 158.519,28.852 ADBMS1818.1
  Bottom Layer w0.3: v1(156.083,24.892) 156.083,26.416 v1(157.988,28.321)
V-: 10nF.2@100.076,60.579 10nF.2@112.867,60.96 10nF.2@112.867,65.532 10nF.2@112.867,69.723 | length 23.7
  Top Layer w0.3: 10nF.2@100.076,60.579 102.997,63.5 110.835,63.5 10nF.2@112.867,65.532 ; 10nF.2@112.867,60.96 112.903,60.96 112.867,60.996 10nF.2@112.867,65.532 ; 10nF.2@112.867,69.723 10nF.2@112.867,65.532
VREF1: 1uF.1@139.319,15.403 ADBMS1818.51 | length 19.6
  Top Layer w0.3: 1uF.1@139.319,15.403 v1(139.319,18.669) ; v1(149.352,28.575) 150.031,29.254 ADBMS1818.51
  Bottom Layer w0.3: v1(139.319,18.669) 149.215,28.565 149.342,28.565 v1(149.352,28.575)
VREF2: 1uF.1@133.604,15.403 10K.2 ADBMS1818.50 | length 87.5
  Top Layer w0.3: 10K.2@127.696,12.192 10K.2@127.696,12.417 ; v1(130.429,23.749) 127.696,23.749 127.696,17.907 10K.2@127.696,12.417 ; 1uF.1@133.604,15.403 130.682,15.403 10K.2@127.696,12.417 ; v1(147.066,29.083) 148.997,29.083 149.219,29.305 149.531,29.617 ADBMS1818.50 ; v1(176.213,24.447) 177.675,24.447 177.739,24.511 177.739,18.923 10K.2@177.739,13.462
  Bottom Layer w0.3: v1(130.429,23.749) 135.763,29.083 v1(147.066,29.083) 167.767,29.083 172.403,24.447 v1(176.213,24.447)
VREG: 1uF.1@145.034,15.403 ADBMS1818.52 | length 17.3
  Top Layer w0.3: 1uF.1@145.034,15.403 v1(145.034,18.542) ; v1(150.495,28.588) 150.495,28.602 150.531,28.638 ADBMS1818.52
  Bottom Layer w0.3: v1(145.034,18.542) 145.034,23.127 v1(150.495,28.588)
X: 10nF.1@101.926,60.579 51_A.2 51_B.1 | length 20.1
  Top Layer w0.3: 10nF.1@101.926,60.579 104.648,60.579 105.471,61.402 51_A.2 107.413,61.402 109.186,59.629 51_B.1
pads on no net: "ISO SPI A.3" "ISO SPI A.4" "ISO SPI B.3" "ISO SPI B.4" "TEMP SENSE 1.7" "TEMP SENSE 1.8" "TEMP SENSE 2.7" "TEMP SENSE 2.8" "VOLT +VE.8" "VOLT +VE.9" "VOLT +VE.10" "VOLT -VE.9" "VOLT -VE.10" ADBMS1818.3 ADBMS1818.5 ADBMS1818.7 ADBMS1818.9 ADBMS1818.11 ADBMS1818.13 ADBMS1818.15 ADBMS1818.17 ADBMS1818.19 ADBMS1818.21 ADBMS1818.23 ADBMS1818.25 ADBMS1818.27 ADBMS1818.29 ADBMS1818.31 ADBMS1818.33 ADBMS1818.35 ADBMS1818.37 ADBMS1818.45 ADBMS1818.46 ADBMS1818.47 ADBMS1818.53 ADBMS1818.54 ADBMS1818.56 Transformer.2 Transformer.5
copper on no net:
  other v2: 35.052,13.843 269.367,13.843 152.22,13.892 152.212,68.863 269.367,68.961 34.417,69.342
  other v3: 288.406,27.537 16.002,27.559

## Silkscreen, mask and mechanical layers (free items; w line width, h text height)
Top Overlay:
  lines w0.254: 137.668,72.898 137.668,58.547 137.668,45.974 192.278,45.974 192.278,72.898
Mechanical 1:
  circle w0.013: c152.213,13.893 r2.1
  circle w0.013: c35.013,13.893 r2.1
  circle w0.013: c16.033,27.568 r7.5
  circle w0.013: c288.392,27.568 r7.5
  circle w0.013: c34.417,69.342 r2.1
  circle w0.013: c152.213,68.893 r2.1
  circle w0.013: c269.413,13.893 r2.1
  circle w0.013: c269.413,68.893 r2.1
  lines w0.013: 63.583,17.993 63.583,72.893 75.583,72.893 75.583,17.993 ; 84.583,17.993 84.583,64.797 96.583,64.805 96.583,9.893 ; 109.083,64.793 76.083,64.793 76.083,72.893 1.013,72.893 ccw(c1.013,71.893) 0.013,71.893 0.013,10.893 ccw(c1.013,10.893) 1.013,9.893 55.083,9.893 55.083,17.993 88.083,17.993 88.083,9.893 216.343,9.893 216.343,17.993 249.343,17.993 249.343,9.893 303.413,9.893 ccw(c303.413,10.893) 304.413,10.893 304.413,71.893 ccw(c303.413,71.893) 303.413,72.893 228.343,72.893 228.343,64.893 195.343,64.893 195.343,72.893 109.083,72.893 ; 109.093,64.77 109.093,68.199 109.093,72.898 ; 207.843,9.893 207.843,64.883 219.843,64.891 219.843,17.993 ; 228.843,17.993 228.843,72.893 240.843,72.893 240.843,17.993

## Dimensions
179.578,58.42 to 192.278,58.293 on Top Overlay
166.751,58.674 to 166.116,45.974 on Top Overlay
159.385,57.023 to 146.685,56.769 on Top Overlay